# EAGLE board memoryboard2 (EAGLE 7.3.0)
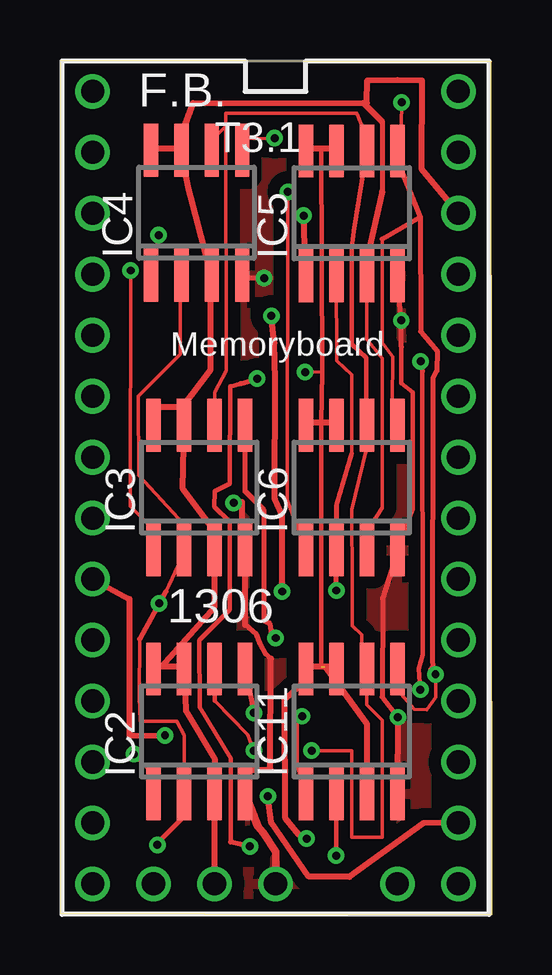
[diagram p0: board, top side]
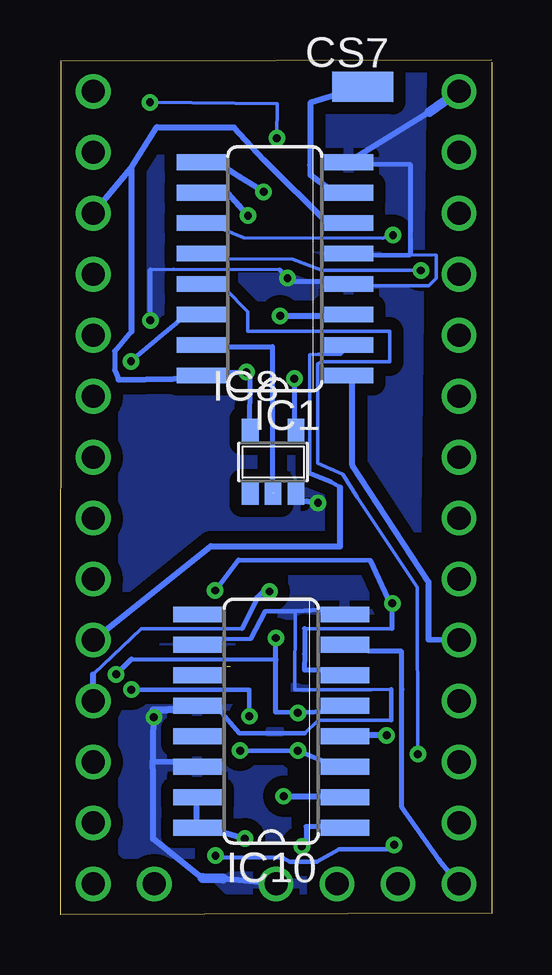
[diagram p1: board, bottom side, seen from below]

Size 17.98 x 35.61 mm. Coordinates in mm from the lower left corner, seen from the top.
Outline: 0,35.52 0,0.05 17.98,0 17.96,35.55
Outline: 0,35.61 17.98,35.56
Copper layers (1*16): Top 0.0356mm / dielectric 1.5011mm / Bottom 0.0356mm
Design rules "LaenPCBOrder": minimum track width 6mil, minimum drill 13mil, track to track 6mil, track to pad 6mil, pad to pad 6mil, via to via 6mil, smd to smd 6mil, copper to edge 15mil, drill to drill 6mil, minimum pad ring 7mil, minimum via ring 7mil, stop-mask expansion 3mil, vias tented up to drill 0mil, thermal gap 10mil

## Footprints (pad centres in the part's own frame; a part is rotated, then mirrored left to right if it is on the bottom)
SMD1,27-2,54 = smd 1.27 x 2.54: 1 0,0
SO16 = smd 0.66 x 2.032: 1 -4.445,-3.073; 2 -3.175,-3.073; 3 -1.905,-3.073; 4 -0.635,-3.073; 5 0.635,-3.073; 6 1.905,-3.073; 7 3.175,-3.073; 8 4.445,-3.073; 9 4.445,3.073; 10 3.175,3.073; 11 1.905,3.073; 12 0.635,3.073; 13 -0.635,3.073; 14 -1.905,3.073; 15 -3.175,3.073; 16 -4.445,3.073
SO-08 = smd 0.6 x 2.2: 1 -1.905,-2.6; 2 -0.635,-2.6; 3 0.635,-2.6; 4 1.905,-2.6; 5 1.905,2.6; 6 0.635,2.6; 7 -0.635,2.6; 8 -1.905,2.6
SOT23-5 = smd 0.69 x 0.99: 1 -0.95,-1.29; 2 0,-1.29; 3 0.95,-1.29; 4 0.95,1.3; 5 -0.95,1.3
TEENSY_3.0_BASIC-PGM = drill 0.965: 0 -7.62,13.97; 1 -7.62,11.43; 2 -7.62,8.89; 3 -7.62,6.35; 3.3V 7.62,11.43; 3.3V1 -2.54,-16.51; 4 -7.62,3.81; 5 -7.62,1.27; 6 -7.62,-1.27; 7 -7.62,-3.81; 8 -7.62,-6.35; 9 -7.62,-8.89; 10 -7.62,-11.43; 11 -7.62,-13.97; 12 -7.62,-16.51; 13 7.62,-16.51; 14/A0 7.62,-13.97; 15/A1 7.62,-11.43; 16/A2 7.62,-8.89; 17/A3 7.62,-6.35; 18/A4 7.62,-3.81; 19/A5 7.62,-1.27; 20/A6 7.62,1.27; 21/A7 7.62,3.81; 22/A8 7.62,6.35; 23/A9 7.62,8.89; AGND 7.62,13.97; GND -7.62,16.51; GND1 0,-16.51; RESET 5.08,-16.51; VBAT -5.08,-16.51; VIN 7.62,16.51

## Placement (x,y rotation side)
CS7  [SMD1,27-2,54]  5.37,34.49 269.6 bottom
IC1  74HC138D  [SO16]  9.03,26.91 90 bottom
IC2  25C080SN  [SO-08]  5.8,7.63 0 top
IC3  25C080SN  [SO-08]  5.8,17.79 0 top
IC4  25C080SN  [SO-08]  5.69,29.25 0 top
IC5  25C080SN  [SO-08]  12.15,29.22 0 top
IC6  25C080SN  [SO-08]  12.15,17.79 0 top
IC8  74AHC1G04DBV  [SOT23-5]  9.11,18.86 0 bottom
IC10  74HC367D  [SO16]  9.18,8.06 90 bottom
IC11  25C080SN  [SO-08]  12.15,7.63 0 top
T3.1  TEENSY_3.0_BASIC-PGM  [TEENSY_3.0_BASIC-PGM]  8.98,17.79 0 top

## Library data of the parts
CS7 = wirepad
IC1 IC10 = 74xx-eu
IC2-IC6 IC11 = microchip; MF: MICROCHIP; MPN: 25C080/SN; OC_FARNELL: unknown; OC_NEWARK: 96K4086
IC8 = 74xx-little-us
T3.1 = Teensy3.0

## Nets
AGND: T3.1.AGND
GND: IC1.4 IC1.5 IC1.8 IC2.4 IC3.4 IC4.4 IC5.4 IC6.4 IC8.3 IC10.8 IC10.10 IC10.12 IC10.14 IC11.4 T3.1.GND T3.1.GND1
N$1: IC8.4 IC10.1
N$2: IC10.2 T3.1.14/A0
N$3: IC10.4 T3.1.7
N$4: IC10.7 T3.1.12
N$5: IC1.15 IC8.2
N$6: IC1.3 T3.1.16/A2
N$7: CS7.1 IC1.7
N$9: IC1.10 IC5.1
N$10: IC2.6 IC3.6 IC4.6 IC5.6 IC6.6 IC10.3 IC11.6
N$11: IC1.2 T3.1.17/A3
N$12: IC1.9 IC6.1
N$13: IC1.12 IC3.1
N$14: IC2.2 IC3.2 IC4.2 IC5.2 IC6.2 IC10.6 IC11.2
N$15: IC1.11 IC4.1
N$16: IC1.1 T3.1.8
N$17: IC2.5 IC3.5 IC4.5 IC5.5 IC6.5 IC10.5 IC11.5
N$29: IC1.14 IC11.1
N$30: IC1.13 IC2.1
VBAT: T3.1.VBAT
VCC: IC1.6 IC1.16 IC2.3 IC2.7 IC2.8 IC3.3 IC3.7 IC3.8 IC4.3 IC4.7 IC4.8 IC5.3 IC5.7 IC5.8 IC6.3 IC6.7 IC6.8 IC8.5 IC10.15 IC10.16 IC11.3 IC11.7 IC11.8 T3.1.3.3V T3.1.3.3V1
VIN: T3.1.VIN

## Tracks (layer width: path | path; a pad name or v marks a point on that pad's centre or on a via)
GND  (via drill 0.33)
  Top 0.152: IC3.4 7.6,15.78 | 8.4,11.19 8.35,11.27 | 7.71,6.03 IC2.4 | 7.71,26.52 IC4.4 | v14.07,8.22 14.07,8.37 | 14.06,15.09 IC6.4 14.06,15.25
  Top 0.178: 14.22,23.65 14.23,23.05 14.22,22.13 14.7,21.76 14.69,16.88 14.06,15.25
  Top 0.203: 8.79,10.68 8.58,10.86 8.35,11.27 8.19,11.67 7.71,12.08 | v8.5,26.52 7.71,26.52 | v14.07,8.22 13.42,9.06 13.44,13.18 14.06,15.09 | 14.22,23.65 v14.22,24.76 IC5.4
  Top 0.254: v7.23,17.16 7.59,17.19 7.6,15.78 | T3.1.GND1 9,1.88 | 7.71,12.08 IC3.4 | 8.79,10.68 8.77,6.06 7.71,6.03 | 14.07,8.37 IC11.4
  Top 0.305: IC2.4 8.25,3.68 8.46,3.42 8.98,2.63 9,1.88
  Bottom 0.152: 11.68,11.48 12.15,11.28 IC10.10 | 6.43,12.75 6.12,12.55 IC10.8 | 13.23,6.38 12.31,6.2 IC10.14 | 12.31,8.58 IC10.12 12.15,8.58 11.37,8.56 | 8.03,17.48 IC8.3 | 8.18,12.65 8.2,9.38 5.01,9.38 4.17,9.38 | 4.17,8.1 7.23,8.11 7.79,7.56 | 3.39,27.5 2.31,27.48 2.31,26.52 2.63,26.21 5.8,26.21 IC1.4 5.96,26.37 | 5.8,27.48 IC1.5 | 8.34,26.37 v8.5,26.52 | 5.8,31.44 IC1.8 5.8,31.29 | 8.84,26.88 13.24,26.89 14.22,26.87 | v14.07,8.22 14.1,8.51
  Bottom 0.178: 11.68,11.48 10.04,11.5 9.42,12.64 8.18,12.65 6.43,12.75 | 4.17,8.1 4.17,9.38 | 7.79,7.56 10.52,7.56 11.37,8.56 | 8.84,26.88 v8.5,26.52
  Bottom 0.203: 5.8,27.48 3.39,27.5 3.39,31.26 5.8,31.29 | 5.96,26.37 8.34,26.37 | v14.22,24.76 14.22,26.87
  Bottom 0.254: 14.12,6.38 13.23,6.38 | 14.12,6.38 14.11,6.92 14.1,8.51 | 8.03,17.48 7.86,17.23 v7.23,17.16 | 14.12,6.38 14.1,5.75 14.1,3.16 12.06,1.52 | T3.1.GND1 11.19,1.5 | 2.59,33.44 5.8,31.44
  Bottom 0.305: 12.31,8.58 14.1,8.51
  Bottom 0.406: 11.19,1.5 12.06,1.52 | T3.1.GND 2.59,33.44
  pour Bottom (isolate 0.508): 2.88,35.27 15.2,35.27 15.36,35.11 15.36,2.6 15.31,2.55 12.49,2.55 12.28,2.33 12.28,2.33 11.01,1.06 3.46,1.06 3.3,1.22
  pour Top (isolate 0.508): 2.68,35.03 14.9,35.03 15.26,34.67 15.26,2.54 15.34,2.45 12.82,2.45 12.82,2.01 11.67,0.86 3.3,0.86 3.04,1.13
N$1  (via drill 0.33)
  Top 0.152: 7.08,22.01 7.09,22.01
  Top 0.178: 7.09,22.01 7.52,22.12 | 7.08,22.01 7.07,17.95 6.45,17.64 6.43,17 7.07,16.36 7.07,12.71 5.8,11.44 5.81,8.64 7.11,6.52 7.11,3.02
  Top 0.203: 7.52,22.12 v8.22,22.34 | v7.91,2.84 7.11,3.02
  Bottom 0.152: 7.73,3.02 7.69,2.96 7.77,2.99 7.76,2.99 v7.91,2.84 | 7.73,3.67 7.7,3.64 7.71,3.66 7.68,3.67 7.71,3.66 7.66,3.66 7.72,3.65 7.67,3.65 7.68,3.67 7.73,3.66 | 8.22,20.2 IC8.4 | 6.12,3.66 IC10.1
  Bottom 0.203: v8.22,22.34 8.22,20.2 | 7.73,3.67 7.73,3.02 | 6.12,3.66 7.73,3.66
N$2  (via drill 0.33)
  Top 0.254: v8.66,4.93 8.79,3.85 10.37,1.58 12.06,1.57 15.13,3.8 T3.1.14/A0
  Bottom 0.152: 6.12,4.93 IC10.2
  Bottom 0.254: v8.66,4.93 6.12,4.93
N$3  (via drill 0.33)
  Top 0.254: v4.37,7.47 2.89,7.46 2.89,13.15 T3.1.7
  Bottom 0.152: 5.96,7.47 IC10.4
  Bottom 0.254: v4.37,7.47 5.96,7.47
N$4
  Bottom 0.152: 5.13,10.98 5.96,11.12 IC10.7
  Bottom 0.203: 5.13,10.98 3.75,10.97 3.74,9.38 3.74,4.47 2.18,2.28 T3.1.12
N$5
  Bottom 0.152: 9.14,17.63 IC8.2 | 11.99,23.67 IC1.15
  Bottom 0.203: 9.14,17.63 9.14,23.67 11.99,23.67
N$6  (via drill 0.33)
  Top 0.254: v8.81,24.95 8.93,23.83 8.96,22.28 8.96,17.32 9.25,16.61 v9.25,13.46
  Bottom 0.152: 9.53,13.42 v9.25,13.46 | 10.39,11.92 14.59,11.92 16.6,10.01 | 5.95,24.95 IC1.3
  Bottom 0.203: 10.39,11.92 9.77,13.19
  Bottom 0.254: v8.81,24.95 5.95,24.95 | 9.77,13.19 9.53,13.42 | T3.1.16/A2 16.6,10.01
N$7
  Bottom 0.152: 6.66,30.17 5.55,30.33 IC1.7 | 5.49,34.46 CS7.1
  Bottom 0.254: 6.66,30.17 7.55,30.82 7.56,31.23 7.55,33.83 5.49,34.46
N$9  (via drill 0.33)
  Top 0.254: IC5.1 v10.15,29.13
  Bottom 0.152: 11.16,30.24 11.99,30.02 IC1.10
  Bottom 0.254: 11.16,30.24 10.51,29.52 v10.15,29.13
N$10  (via drill 0.33)
  Top 0.152: 6.91,32.85 6.91,33.39 12.36,33.39 12.79,32.4 IC5.6 | 6.91,32.85 6.43,32.37 6.44,31.92 IC4.6 | IC3.6 6.44,21.76 6.92,22.67 6.91,32.85 | v8.07,6.84 7.83,7.5 6.44,8.9 | IC6.6 12.79,19.38 12.76,19.37 12.17,16.87 12.18,13.79 12.18,12.04 12.58,11.66 12.58,11.35 IC11.6 12.79,8.74 13.42,8.11 13.42,3.82 13.42,3.23 12.15,3.23 12.15,3.82 12.15,6.82 11.52,6.84 v10.48,6.84
  Top 0.178: IC2.6 6.44,8.9 | IC5.6 12.25,28.48 12.15,27.79 12.17,23.76 12.76,23.21 12.76,19.37
  Bottom 0.152: 6.96,6.37 6.12,6.2 IC10.3
  Bottom 0.178: 6.96,6.37 v8.07,6.84 v10.48,6.84
N$11
  Bottom 0.152: 7.58,18.4 7.57,23.33 7.23,23.35 6.28,23.35 5.96,23.67 IC1.2
  Bottom 0.178: 7.58,18.4 6.69,18.03 6.31,17.8
  Bottom 0.254: 6.31,17.8 6.31,15.34 11.7,15.35 T3.1.17/A3
N$12  (via drill 0.33)
  Top 0.152: v9.5,30.12 9.46,17.27 10.25,15.25 IC6.1
  Bottom 0.152: 11.17,31.16 11.99,31.29 IC1.9
  Bottom 0.254: 11.17,31.16 10.49,30.73 v9.5,30.12
N$13  (via drill 0.33)
  Top 0.152: v2.95,26.84 2.93,17.02 3.88,16.07 IC3.1
  Bottom 0.152: v2.95,26.84 7.07,26.84 8.29,27.31 11.59,27.33 11.99,27.48 IC1.12
N$14  (via drill 0.33)
  Top 0.152: 12.15,19.22 12.17,22.5 11.53,23.08 IC5.2 | v4.13,12.97 4.41,13.46 4.56,13.75 5.17,15.09 IC3.2 5.17,16.25 3.28,18.3 3.26,21.6 5.01,23.35 5.01,26.52 IC4.2 | 3.31,11.48 3.31,9.09 3.34,8.05 4.87,8.06 5.18,7.47 IC2.2 5.17,4.93 5.09,4.02 | 4.27,3.19 4.1,3.06 v4.06,2.91
  Top 0.178: 12.15,19.22 11.52,17.03 | v11.5,2.46 IC11.2 | 5.09,4.02 4.27,3.19
  Top 0.203: 11.52,17.03 IC6.2 v11.52,13.51 | 4.41,13.46 3.31,11.48
  Bottom 0.152: 7.09,10.2 6.12,10.01 IC10.6 | 7.79,11.91 4.14,11.91 4.2,12.94 | v4.06,2.91 4.11,2.73 4.17,2.73 | 11.28,2.38 11.46,2.39 v11.5,2.46
  Bottom 0.178: 4.17,2.73 6.34,2.73 7.29,2.21 8.41,2.21 8.7,2.37 11.28,2.38
  Bottom 0.203: 7.09,10.2 7.8,10.2 7.79,10.86 7.79,11.91 | v11.52,13.51 10.55,14.77 5.04,14.75 4.2,12.94 | 4.14,11.91 v4.13,12.97
N$15  (via drill 0.33)
  Top 0.152: v4.11,28.31 4,27.72 3.9,26.68 IC4.1
  Bottom 0.152: v4.11,28.31 4.52,28.19 10.33,28.2 11.7,28.76 IC1.11
N$16
  Bottom 0.152: 5.8,22.4 IC1.1
  Bottom 0.254: 5.8,22.4 5.8,18.72 2.62,13.86 2.62,11.46 T3.1.8
N$17  (via drill 0.33)
  Top 0.152: v8.99,11.53 8.84,11.53 | 8.58,12.21 8.52,12.24 | IC11.5 14.06,9.38 14.75,8.56 15.27,8.55 15.65,9.06 v15.65,10.01 | 14.22,31.6 14.06,31.76 IC5.5 14.22,31.6 | 14.22,31.6 14.25,30.91 | IC6.5 14.06,21.16 13.85,21.34 13.86,23.24 13.42,23.83 13.42,28.15 | v8.94,32.36 7.6,32.33 IC4.5 | v14.23,33.84 14.22,32.88 14.22,31.6
  Top 0.203: IC2.5 v8.07,8.41 | IC3.5 7.71,17.63 8.5,16.84 8.52,12.24 | 8.84,11.53 8.75,12.12 8.58,12.21 | v15.65,10.01 15.46,10.22 15.45,10.23 15.53,10.35 15.52,10.59 15.54,22.35 15.71,22.65 15.71,23.48 15.03,24.29 15,29.05 | 14.25,30.91 15,29.05 | 15,29.05 13.42,28.15
  Bottom 0.152: 6.69,8.5 IC10.5 | 8.99,10.62 9.04,10.63 8.98,10.62 | v8.94,32.36 8.94,33.79 v14.23,33.84
  Bottom 0.178: 15.01,10.65 8.98,10.62
  Bottom 0.203: 6.69,8.5 v8.07,8.41 9,8.44 8.99,10.62 | 8.98,10.62 v8.99,11.53 | v15.65,10.01 15.01,10.65
N$29  (via drill 0.33)
  Top 0.152: 15.1,22.76 15.11,22.63 | 10.09,5.25 10.25,5.09 IC11.1
  Top 0.178: 15.1,22.76 15.11,10.82 14.94,10.25 v15.01,9.38 | 15.11,22.63 v15.03,23.05 | 10.09,5.25 9.98,6.04 9.87,6.15 9.87,8.03 10.09,8.25 v10.09,8.27
  Bottom 0.152: 12.49,25.23 IC1.14
  Bottom 0.178: 12.49,25.23 13.14,24.63 13.71,24.15 v15.03,23.05 | v15.01,9.38 10.09,9.37 v10.09,8.27
N$30  (via drill 0.33)
  Top 0.152: v3.08,6.69 3.13,6.6 3.93,5.8 IC2.1
  Bottom 0.152: v3.08,6.69 3.1,13.64 5.51,17.27 5.59,17.38 6.21,18.34 7.23,18.8 7.24,22.94 7.07,23.03 4.25,23.03 4.25,24.31 4.85,24.3 10.15,24.3 10.15,25.13 11.1,26.08 11.99,26.21 IC1.13
VCC  (via drill 0.33)  (1 unrouted)
  Top 0.152: 10.25,31.92 IC5.8 | 11.52,31.92 IC5.7 | 10.25,20.49 IC6.8 | 11.52,20.49 IC6.7 | 10.25,10.33 IC11.8 10.21,9.76 | 11.52,10.33 IC11.7 | 9.93,3.35 v10.28,3.17 | IC6.3 12.94,16.19 13.44,16.95 13.42,23.19 12.79,23.98 IC5.3 12.79,27.32 | 3.9,31.92 IC4.8 | 5.01,31.92 IC4.7 | 6.28,26.68 IC4.3 6.28,26.52 | 5.09,21.14 5.17,20.49 IC3.7 | 3.94,21.14 IC3.8 | 4.22,10.33 3.9,10.33 IC2.8 | 5.17,10.33 IC2.7 | IC3.3 6.24,16.24 | 12.63,33.83 12.79,33.83 | v10.22,22.6 10.92,22.62
  Top 0.178: 10.88,10.33 10.88,20.49 10.92,22.62 10.88,31.92
  Top 0.203: 13.42,33.03 13.42,30.14
  Top 0.254: 11.52,31.92 10.88,31.92 10.25,31.92 | 11.52,20.49 10.88,20.49 10.25,20.49 | 11.52,10.33 11.04,10.33 | 11.04,10.33 10.25,10.33 | IC11.3 12.79,7.95 11.04,10.33 | 9.93,3.35 9.37,4.04 9.35,8.95 10.21,9.76 | 4.85,31.92 5.01,31.92 5.33,30.33 6.28,26.68 | 4.85,31.92 3.9,31.92 | T3.1.3.3V1 IC2.3 6.46,6.47 5.24,8.49 IC2.7 | 3.94,21.14 5.09,21.14 6.28,22.71 6.28,26.52 | 5.17,10.33 4.22,10.33 6.44,12.83 IC3.3 | IC3.7 5.12,17.75 6.24,16.24 | 13.42,30.14 12.79,27.32 | 13.42,33.03 12.63,33.83 5.54,33.82 4.85,31.92 | T3.1.3.3V 15.05,31.08 15.08,34.77 14.06,34.78 12.8,34.76 12.79,33.83
  Bottom 0.152: 12.31,3.66 IC10.16 12.15,3.51 11.39,3.48 | 12.31,4.78 IC10.15 | 10.09,20.17 IC8.5 | 11.97,22.59 IC1.16 12.14,22.34 | 6.76,28.75 5.96,28.91 IC1.6
  Bottom 0.203: 10.09,20.17 10.08,22.4 v10.22,22.6 11.97,22.59 | 15.54,22.29 15.7,22.69 15.7,23.48 15.01,24.3
  Bottom 0.254: 12.31,4.78 12.31,3.66 | v10.28,3.17 11.39,3.48 | 6.76,28.75 9.49,31.45 10.74,32.8 13.94,32.82 15.01,31.13 | T3.1.3.3V 15.01,31.13 | 15.54,22.29 12.14,22.34 | 15.01,31.13 15.01,24.3

## Text on the board
tPlace: F.B. | Memoryboard | 1306